# Altium PCB Filtro Final.PcbDoc
Units mm, origin at the board's own origin, x right, y up, seen from the top; angles counter-clockwise.
Board outline 100 x 100.08 mm, 2 copper layers (Top Layer, Bottom Layer); 81 components, 46 nets, 396 pads, 62 vias.
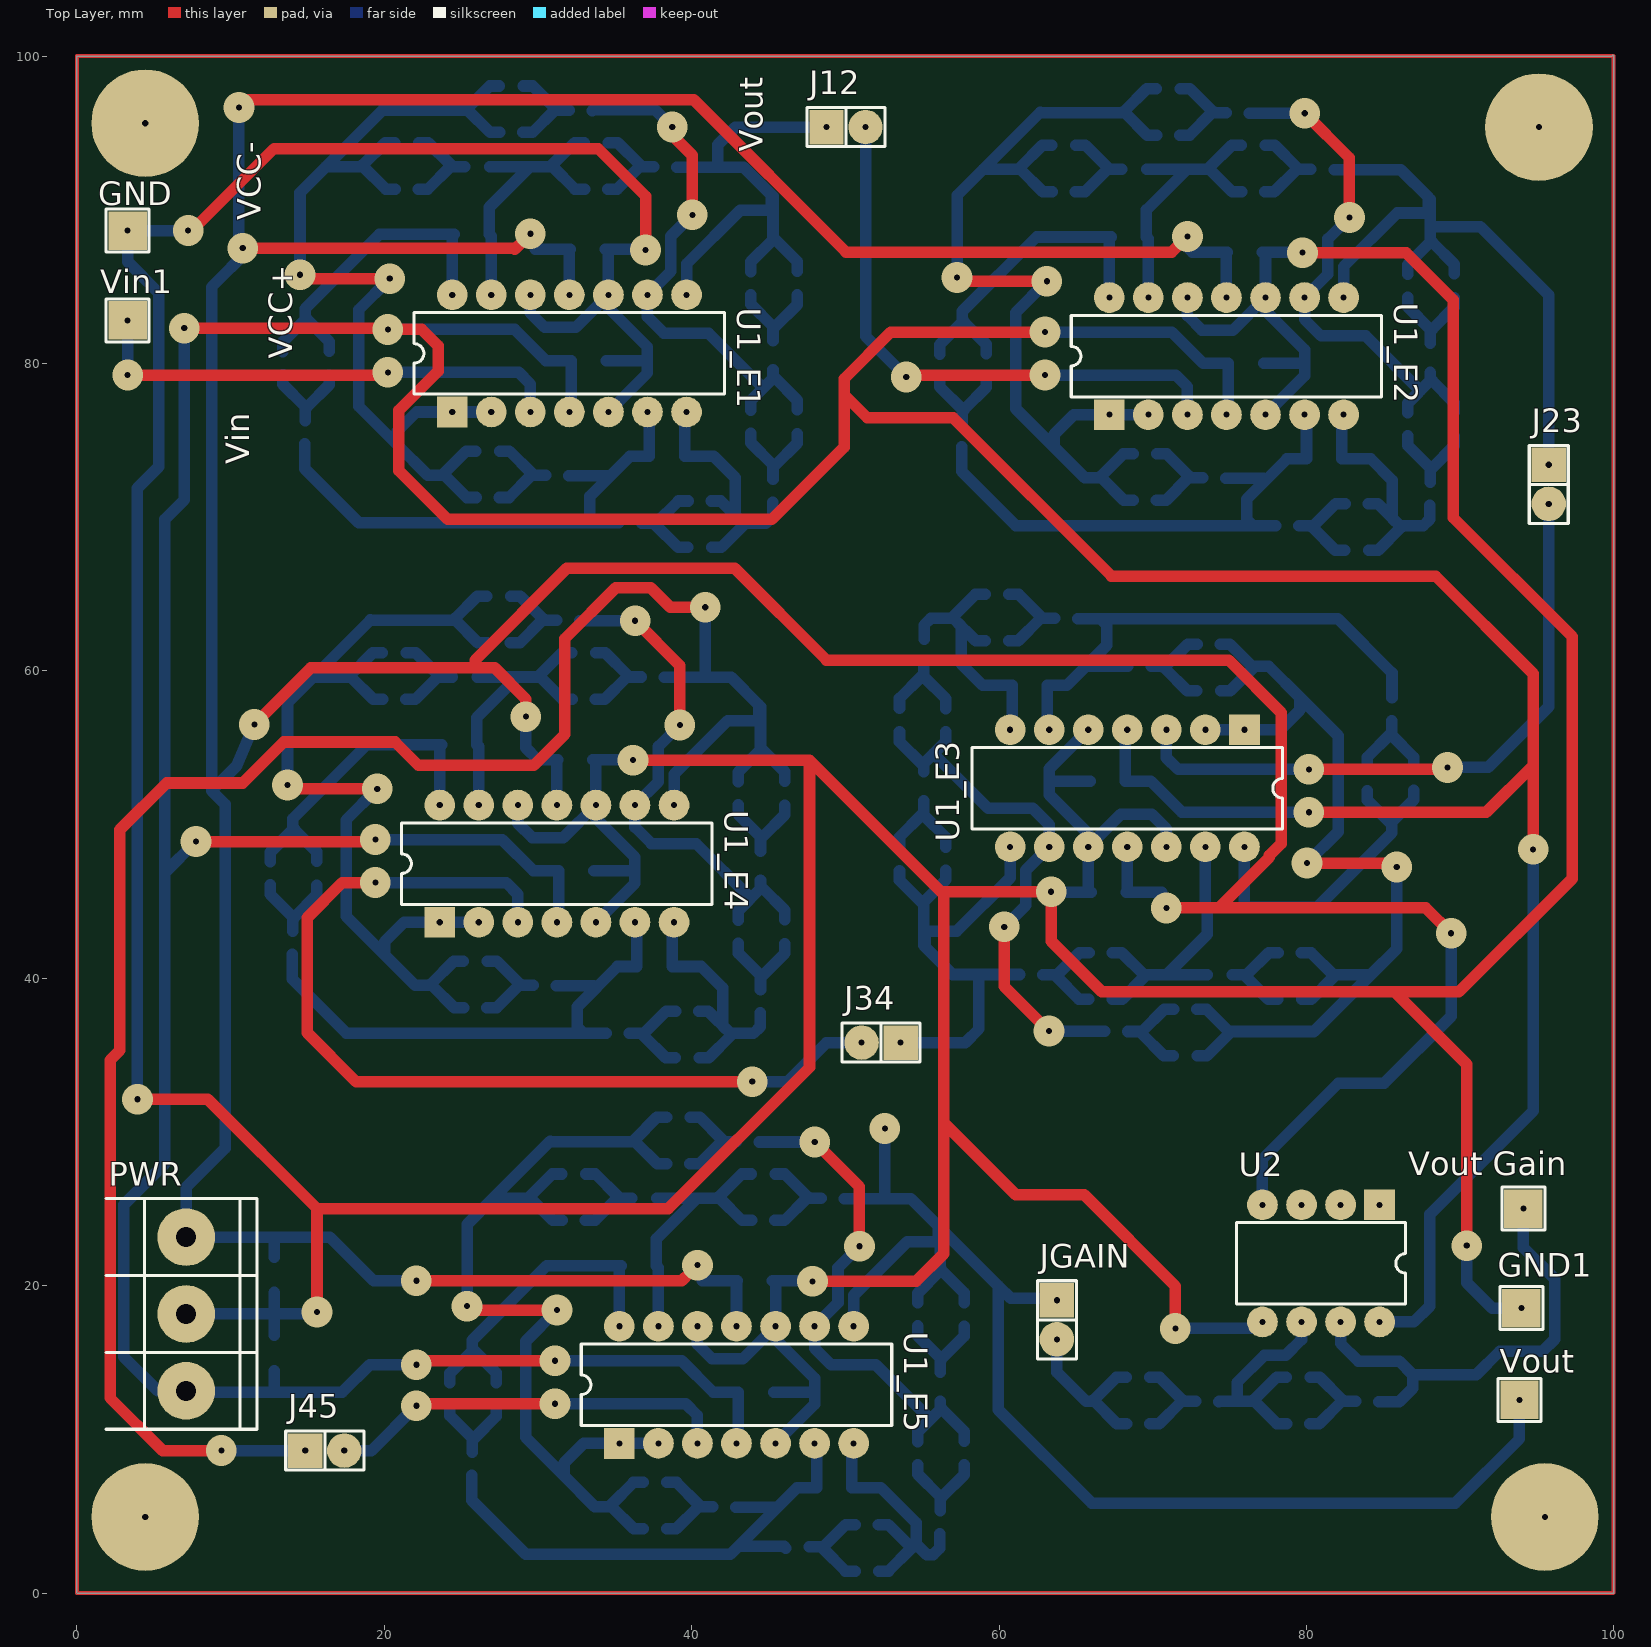
[diagram p0: Top Layer view]
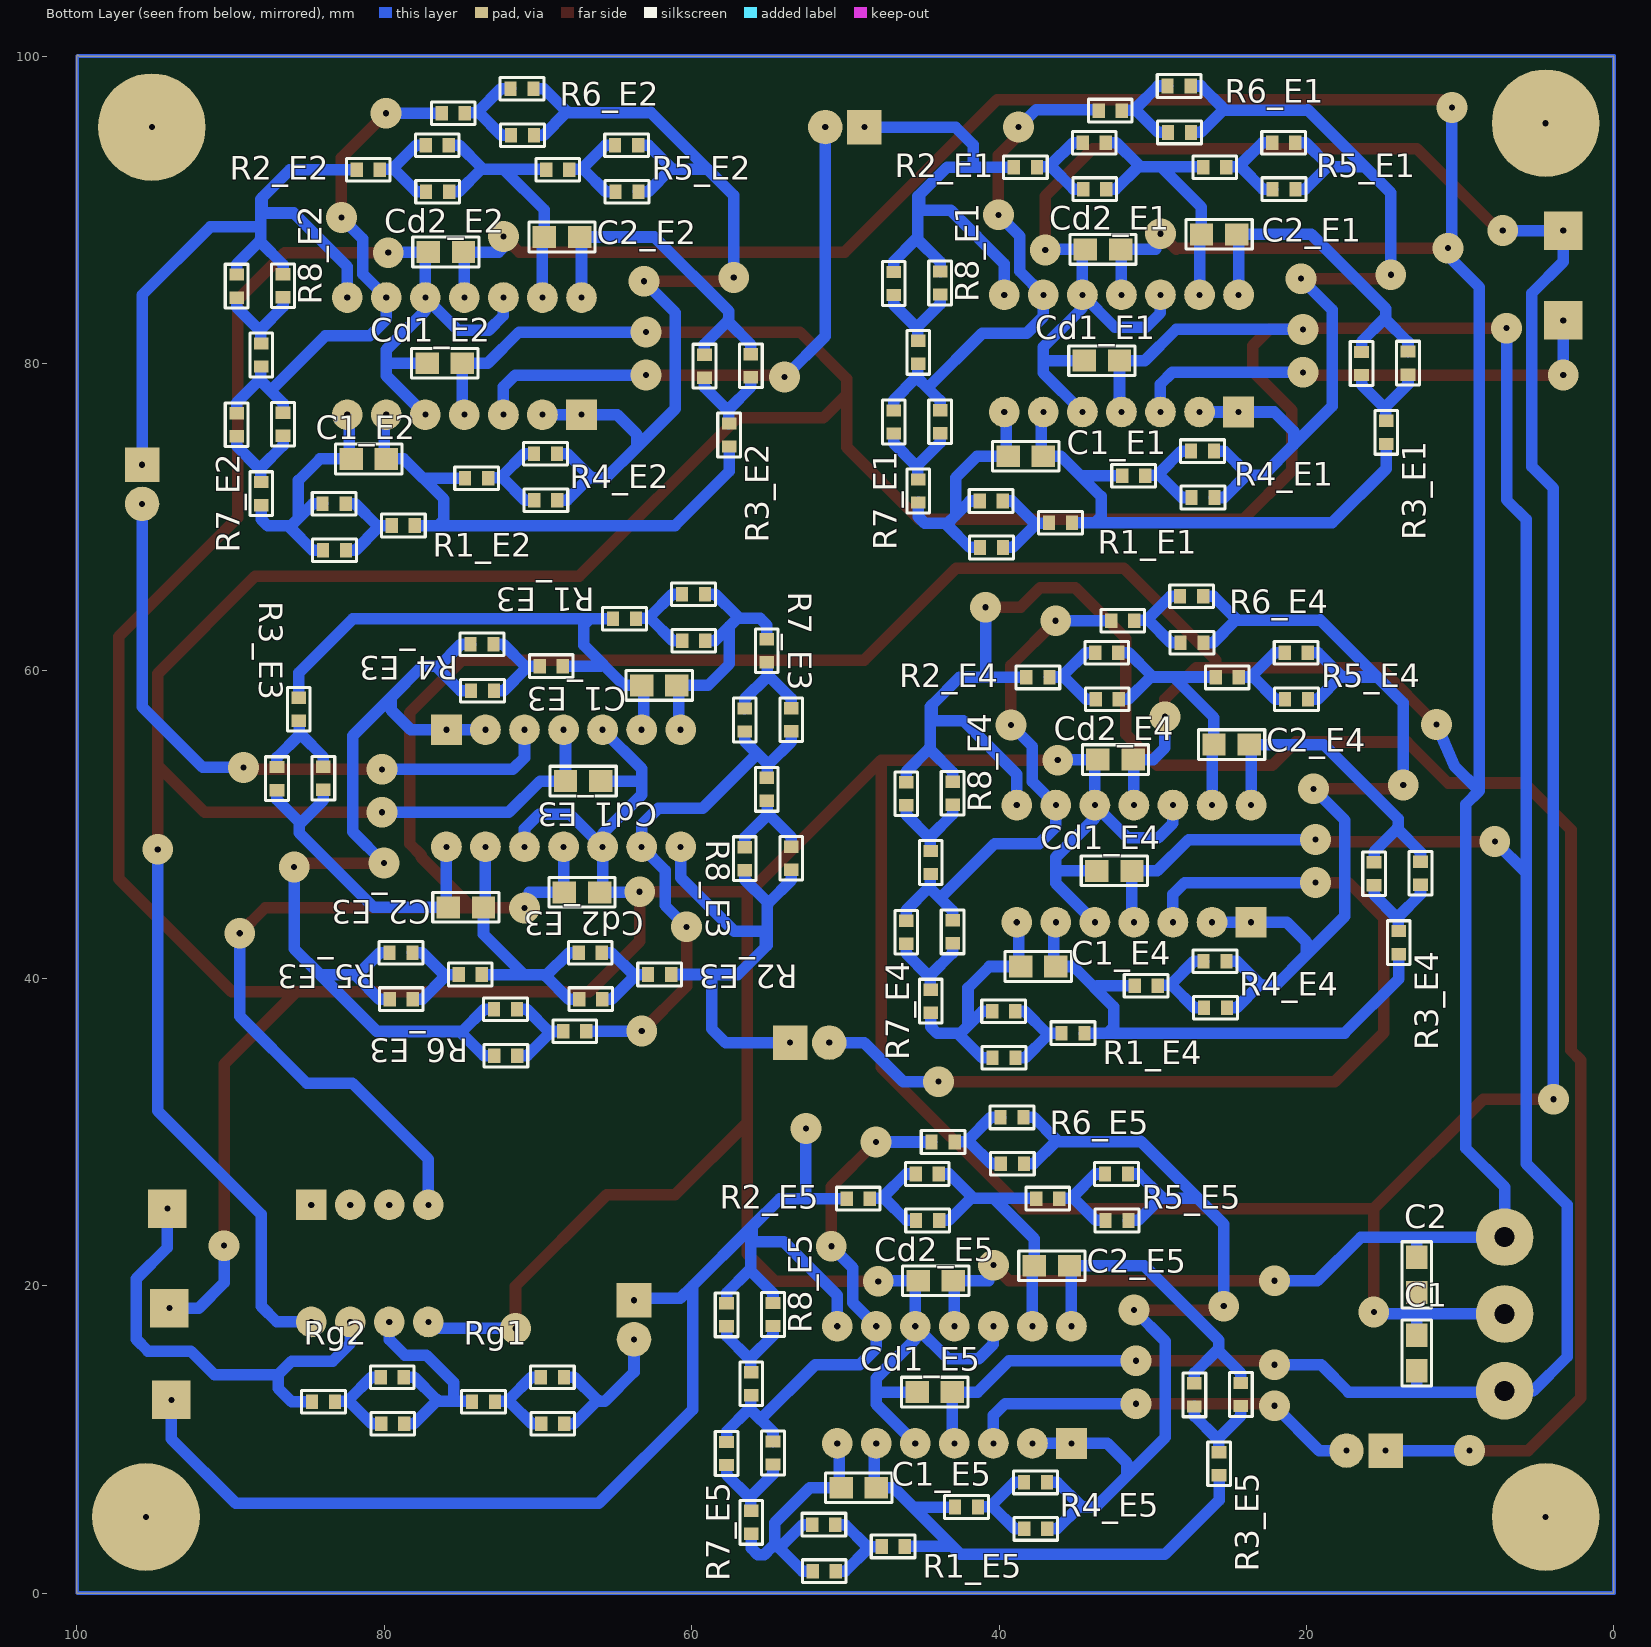
[diagram p1: Bottom Layer view, seen from below]

## Layer stack, top to bottom
Top Solder: solder mask 0.0102, Solder Resist, Dk 3.5
Top Layer: signal copper 0.0356
Dielectric 1: dielectric 0.32, FR-4, Dk 4.8
Bottom Layer: signal copper 0.0356
Bottom Solder: solder mask 0.0102, Solder Resist, Dk 3.5

## Board outline
0,0 100,0 100,100.025 99.949,100.076 99.873,100 0,100 0,0

## Design rules (kind name [scope] priority, off if disabled: settings)
Clearance [All] p1: gap=0.254
PolygonConnect [All] p1: connectstyle=Relief reliefconductorwidth=0.254 reliefentries=4 polygonreliefangle="90 Angle" airgapwidth=0.254
RoomDefinition U_Gain [InComponentClass('U_Gain')] p1: confinementstyle=ConfineIn formatcopy=TRUE lockcomponents=FALSE outline 88.817,27.419 65.068,27.419 65.068,9.131 88.817,9.131
RoomDefinition E5 [InComponentClass('E5')] p2: confinementstyle=ConfineIn formatcopy=TRUE lockcomponents=FALSE outline 20.32,32.131 20.32,-0.127 59.055,-0.127 59.055,32.131
RoomDefinition E4 [InComponentClass('E4')] p3: confinementstyle=ConfineIn formatcopy=TRUE lockcomponents=FALSE outline 8.636,66.04 8.636,33.782 47.371,33.782 47.371,66.04
RoomDefinition E3 [InComponentClass('E3')] p4: confinementstyle=ConfineIn formatcopy=TRUE lockcomponents=FALSE outline 90.932,33.782 90.932,66.04 52.197,66.04 52.197,33.782
RoomDefinition E2 [InComponentClass('E2')] p5: confinementstyle=ConfineIn formatcopy=TRUE lockcomponents=FALSE outline 52.197,99.187 52.197,66.929 90.932,66.929 90.932,99.187
RoomDefinition E1 [InComponentClass('E1')] p6: confinementstyle=ConfineIn formatcopy=TRUE lockcomponents=FALSE outline 9.449,99.233 9.449,66.975 48.184,66.975 48.184,99.233
RoutingVias [All] p1: holewidth=0.4 width=2 viastyle="Through Hole" minholewidth=0.4 minwidth=2 maxholewidth=0.4 maxwidth=2
SolderMaskExpansion [All] p1: expansion=0.102
UnpouredPolygon [All] p1: allowunpoured=FALSE
Width [All] p1: maxlimit=0.75 minlimit=0.75 preferedwidth=0.75
29 further rules are at their usual default settings.

## Classes and differential pairs
component class E1: C1_E1 C2_E1 Cd1_E1 Cd2_E1 R1_E1 R2_E1 R3_E1 R4_E1 R5_E1 R6_E1 R7_E1 R8_E1 U1_E1
component class E2: C1_E2 C2_E2 Cd1_E2 Cd2_E2 R1_E2 R2_E2 R3_E2 R4_E2 R5_E2 R6_E2 R7_E2 R8_E2 U1_E2
component class E3: C1_E3 C2_E3 Cd1_E3 Cd2_E3 R1_E3 R2_E3 R3_E3 R4_E3 R5_E3 R6_E3 R7_E3 R8_E3 U1_E3
component class E4: C1_E4 C2_E4 Cd1_E4 Cd2_E4 R1_E4 R2_E4 R3_E4 R4_E4 R5_E4 R6_E4 R7_E4 R8_E4 U1_E4
component class E5: C1_E5 C2_E5 Cd1_E5 Cd2_E5 R1_E5 R2_E5 R3_E5 R4_E5 R5_E5 R6_E5 R7_E5 R8_E5 U1_E5
component class "Esquemático entero": C1 C2 GND GND1 J12 J23 J34 J45 JGAIN PWR Vin1 Vout "Vout Gain"
component class U_Gain: Rg1 Rg2 U2
channel class FlescherTow: E1 E2 E3 E4 E5

## Components (designator, comment, footprint, x,y, rotation, side; value= is the part's Value field where it differs from the comment)
C1 "4,7uF" 0805 12.827,15.621 r90 bottom
C1_E1 "CAP" 0805 38.265,73.96 r0 bottom (schematic designator C1)
C1_E2 "CAP" 0805 81.013,73.787 r0 bottom (schematic designator C1)
C1_E3 "CAP" 0805 62.116,59.055 r180 bottom (schematic designator C1)
C1_E4 "CAP" 0805 37.452,40.767 r0 bottom (schematic designator C1)
C1_E5 "CAP" 0805 49.136,6.858 r0 bottom (schematic designator C1)
C2 "4,7uF" 0805 12.827,20.701 r90 bottom
C2_E1 "CAP" 0805 25.692,88.399 r180 bottom (schematic designator C2)
C2_E2 "CAP" 0805 68.44,88.227 r180 bottom (schematic designator C2)
C2_E3 "CAP" 0805 74.689,44.615 r0 bottom (schematic designator C2)
C2_E4 "CAP" 0805 24.879,55.207 r180 bottom (schematic designator C2)
C2_E5 "CAP" 0805 36.563,21.298 r180 bottom (schematic designator C2)
Cd1_E1 "100n" 0805 33.312,80.183 r0 bottom (schematic designator Cd1)
Cd1_E2 "100n" 0805 76.06,80.01 r0 bottom (schematic designator Cd1)
Cd1_E3 "100n" 0805 67.069,52.832 r180 bottom (schematic designator Cd1)
Cd1_E4 "100n" 0805 32.499,46.99 r0 bottom (schematic designator Cd1)
Cd1_E5 "100n" 0805 44.183,13.081 r0 bottom (schematic designator Cd1)
Cd2_E1 "100n" 0805 33.243,87.422 r0 bottom (schematic designator Cd2)
Cd2_E2 "100n" 0805 75.991,87.249 r0 bottom (schematic designator Cd2)
Cd2_E3 "100n" 0805 67.138,45.593 r180 bottom (schematic designator Cd2)
Cd2_E4 "100n" 0805 32.43,54.229 r0 bottom (schematic designator Cd2)
Cd2_E5 "100n" 0805 44.114,20.32 r0 bottom (schematic designator Cd2)
GND "TP" TPTH 3.302,88.646 r0 top
GND1 "TP" TPTH 93.98,18.542 r90 top
J12 "Connect" JUMPER2#1 50.038,95.377 r0 top
J23 "Connect" JUMPER2#1 95.758,72.136 r270 top
J34 "Connect" JUMPER2#1 52.324,35.814 r180 top
J45 "Connect" JUMPER2#1 16.129,9.271 r0 top
JGAIN "JUMPER" JUMPER2#2 63.754,17.78 r270 top
PWR "" BORNERA3 7.112,18.161 r180 top
R1_E1 "" PCBComponent_1#1 44.361,68.499 r180 bottom (schematic designator R1)
R1_E2 "" PCBComponent_1#2 87.109,68.326 r180 bottom (schematic designator R1)
R1_E3 "" PCBComponent_1#2 56.02,64.516 r0 bottom (schematic designator R1)
R1_E4 "" PCBComponent_1#2 43.548,35.306 r180 bottom (schematic designator R1)
R1_E5 "" PCBComponent_1#2 55.245,1.905 r180 bottom (schematic designator R1)
R2_E1 "" PCBComponent_1#2 29.941,93.899 r0 bottom (schematic designator R2)
R2_E2 "" PCBComponent_1#2 72.689,93.726 r0 bottom (schematic designator R2)
R2_E3 "" PCBComponent_1#2 70.44,39.116 r180 bottom (schematic designator R2)
R2_E4 "" PCBComponent_1#2 29.128,60.706 r0 bottom (schematic designator R2)
R2_E5 "" PCBComponent_1#2 40.812,26.797 r0 bottom (schematic designator R2)
R3_E1 "" PCBComponent_1#2 15.951,83.866 r270 bottom (schematic designator R3)
R3_E2 "" PCBComponent_1#2 58.699,83.693 r270 bottom (schematic designator R3)
R3_E3 "" PCBComponent_1#2 84.43,49.149 r90 bottom (schematic designator R3)
R3_E4 "" PCBComponent_1#2 15.138,50.673 r270 bottom (schematic designator R3)
R3_E5 "" PCBComponent_1#2 26.822,16.764 r270 bottom (schematic designator R3)
R4_E1 "" PCBComponent_1#2 22.898,73.833 r0 bottom (schematic designator R4)
R4_E2 "" PCBComponent_1#2 65.646,73.66 r0 bottom (schematic designator R4)
R4_E3 "" PCBComponent_1#2 77.483,59.182 r180 bottom (schematic designator R4)
R4_E4 "" PCBComponent_1#2 22.085,40.64 r0 bottom (schematic designator R4)
R4_E5 "" PCBComponent_1#2 33.769,6.731 r0 bottom (schematic designator R4)
R5_E1 "" PCBComponent_1#3 17.622,93.899 r0 bottom (schematic designator R5)
R5_E2 "" PCBComponent_1#2 60.37,93.726 r0 bottom (schematic designator R5)
R5_E3 "" PCBComponent_1#2 82.759,39.116 r180 bottom (schematic designator R5)
R5_E4 "" PCBComponent_1#2 16.809,60.706 r0 bottom (schematic designator R5)
R5_E5 "" PCBComponent_1#2 28.493,26.797 r0 bottom (schematic designator R5)
R6_E1 "" PCBComponent_1#2 24.422,97.582 r0 bottom (schematic designator R6)
R6_E2 "" PCBComponent_1#2 67.17,97.409 r0 bottom (schematic designator R6)
R6_E3 "" PCBComponent_1#2 75.959,35.433 r180 bottom (schematic designator R6)
R6_E4 "" PCBComponent_1#2 23.609,64.389 r0 bottom (schematic designator R6)
R6_E5 "" PCBComponent_1#2 35.293,30.48 r0 bottom (schematic designator R6)
R7_E1 "" PCBComponent_1#1 46.393,80.056 r270 bottom (schematic designator R7)
R7_E2 "" PCBComponent_1#2 89.141,79.883 r270 bottom (schematic designator R7)
R7_E3 "" PCBComponent_1#2 53.988,52.959 r90 bottom (schematic designator R7)
R7_E4 "" PCBComponent_1#2 45.58,46.863 r270 bottom (schematic designator R7)
R7_E5 "" PCBComponent_1#2 57.264,12.954 r270 bottom (schematic designator R7)
R8_E1 "" PCBComponent_1#2 46.393,89.073 r270 bottom (schematic designator R8)
R8_E2 "" PCBComponent_1#2 89.141,88.9 r270 bottom (schematic designator R8)
R8_E3 "" PCBComponent_1#2 53.988,43.942 r90 bottom (schematic designator R8)
R8_E4 "" PCBComponent_1#2 45.58,55.88 r270 bottom (schematic designator R8)
R8_E5 "" PCBComponent_1#2 57.264,21.971 r270 bottom (schematic designator R8)
Rg1 "" PCBComponent_1#2 65.195,13.576 r0 bottom
Rg2 "" PCBComponent_1#2 75.609,13.576 r0 bottom
U1_E1 "TL074" J014 32.042,80.652 r0 top (schematic designator U1)
U1_E2 "TL074" J014 74.79,80.48 r0 top (schematic designator U1)
U1_E3 "TL074" J014 68.339,52.362 r180 top (schematic designator U1)
U1_E4 "TL074" J014 31.229,47.46 r0 top (schematic designator U1)
U1_E5 "TL074" J014 42.913,13.551 r0 top (schematic designator U1)
U2 "TL082" DIP8 80.943,21.45 r180 top
Vin1 "TP" TPTH 3.302,82.804 r0 top
Vout "TP" TPTH 93.853,12.573 r90 top
"Vout Gain" "TP" TPTH 94.107,25.019 r90 top

## Footprints (in the part's own frame and the unit in brackets; to place one, negate y for a bottom-side part, rotate by r counter-clockwise, add the part's x,y. Pads: shape width x height; smd on the part's side, far side on the other; paste and mask are expansions set on the pad)
0805 [mil] "Pasivo 0805"
  rect 60x56 smd: 1(-45,0) 2(45,0)
  silkscreen extent -85,-38 85,38, body extent -39,-25 39,25, height 15
BORNERA3 [mm] "Bornera con Tornillos 5mm separación"
  round 3.75 hole 1.3: 1(0,5) 2(0,0) 3(0,-5)
  silkscreen extent -4.6,-7.5 5.2,7.5, body extent -3.76,-7.39 3.94,8.11, height 10.05
DIP8 [mm] "DIP; 8 Leads; Row Spacing 7.62 mm; Pitch 2.54 mm"
  rect 2x2 hole 0.4: 1(-3.81,-3.81)
  round 2 hole 0.4: 2(-1.27,-3.81) 3(1.27,-3.81) 4(3.81,-3.81) 5(3.81,3.81) 6(1.27,3.81) 7(-1.27,3.81) 8(-3.81,3.81)
  silkscreen extent -5.5,-2.65 5.5,2.65
J014 [mm] "DIP; 14 Leads; Row Spacing 7.62 mm; Pitch 2.54 mm"
  rect 2x2 hole 0.4: 1(-7.62,-3.81)
  round 2 hole 0.4: 2(-5.08,-3.81) 3(-2.54,-3.81) 4(0,-3.81) 5(2.54,-3.81) 6(5.08,-3.81) 7(7.62,-3.81) 8(7.62,3.81) 9(5.08,3.81) 10(2.54,3.81) 11(0,3.81) 12(-2.54,3.81) 13(-5.08,3.81) 14(-7.62,3.81)
  silkscreen extent -10.1,-2.65 10.1,2.65
JUMPER2#1 [mm]
  rect 2.24x2.24 hole 0.4: 1(-1.27,0)
  round 2.24 hole 0.4: 2(1.27,0)
  silkscreen extent -2.54,-1.27 2.54,1.27, body extent -2.46,-1.27 2.54,1.27, height 9.5
JUMPER2#2 [mm]
  rect 2.25x2.25 hole 0.4: 1(-1.27,0)
  round 2.25 hole 0.4: 2(1.27,0)
  silkscreen extent -2.54,-1.27 2.54,1.27, body extent -2.46,-1.27 2.54,1.27, height 9.5
PCBComponent_1#1 [mm]
  rect 0.8x0.95 smd: 1(3.092,2.553) 1(3.118,-0.47) 2(9.1,1.13) ""(4.592,2.553) ""(4.618,-0.47) ""(7.6,1.13)
  Top Layer lines w0.75: 7.6,1.105 6.667,1.105 5.22,2.553 4.592,2.553 ; 6.693,0.978 5.245,-0.47 4.618,-0.47 ; 3.092,2.553 2.465,2.553 1.524,1.612 1.017,1.105 0.471,1.105 ; 3.067,-0.47 2.439,-0.47 0.991,0.978
  silkscreen extent 2.42,-1.21 9.77,3.29, body extent 3.04,-0.88 9.15,2.95, height 0.44
PCBComponent_1#2 [mm]
  rect 0.8x0.95 smd: 1(3.092,2.553) 1(3.118,-0.47) 2(9.1,1.13) ""(4.592,2.553) ""(4.618,-0.47) ""(7.6,1.13)
  Top Layer lines w0.75: 7.6,1.105 6.667,1.105 5.22,2.553 4.592,2.553 ; 6.693,0.978 5.245,-0.47 4.618,-0.47 ; 3.092,2.553 2.465,2.553 1.017,1.105 0.471,1.105 ; 3.067,-0.47 2.439,-0.47 0.991,0.978
  silkscreen extent 2.42,-1.21 9.77,3.29, body extent 3.04,-0.88 9.15,2.95, height 0.44
PCBComponent_1#3 [mm]
  rect 0.8x0.95 smd: 1(3.092,2.553) 1(3.118,-0.47) 2(9.1,1.13) ""(4.592,2.553) ""(4.618,-0.47) ""(7.6,1.13)
  Top Layer lines w0.75: 0.471,1.105 0.539,1.105 0.666,1.105 1.017,1.105 2.465,2.553 3.092,2.553 ; 0.991,0.978 1.017,0.953 2.439,-0.47 3.067,-0.47 ; 4.592,2.553 5.22,2.553 6.668,1.105 7.6,1.105 ; 4.618,-0.47 5.245,-0.47 6.693,0.978
  silkscreen extent 2.42,-1.21 9.77,3.29, body extent 3.04,-0.88 9.15,2.95, height 0.44
TPTH [mm]
  rect 2.5x2.5 hole 0.4: 1(0,0)
  silkscreen extent -1.4,-1.4 1.4,1.4, body extent -1.27,-1.27 1.27,1.27, height 6.04

## Part data
C1 C2 Cd1_E1 Cd1_E2 Cd1_E3 Cd1_E4 Cd1_E5 Cd2_E1 Cd2_E2 Cd2_E3 Cd2_E4 Cd2_E5: library part CAP
J12 J23 J34 J45: library part JUMPER
PWR: library part "BORNERA 3"
R1_E1 R1_E2 R1_E3 R1_E4 R1_E5 R2_E1 R2_E2 R2_E3 R2_E4 R2_E5 R3_E1 R3_E2 R3_E3 R3_E4 R3_E5 R4_E1 R4_E2 R4_E3 R4_E4 R4_E5 R5_E1 R5_E2 R5_E3 R5_E4 R5_E5 R6_E1 R6_E2 R6_E3 R6_E4 R6_E5 R7_E1 R7_E2 R7_E3 R7_E4 R7_E5 R8_E1 R8_E2 R8_E3 R8_E4 R8_E5 Rg1 Rg2: library part SPres
U1_E1 U1_E2 U1_E3 U1_E4 U1_E5: library part TL074J, "Low-Noise JFET-Input Operational Amplifier"
U2: library part TL082AMN, "General-Purpose J-FET Dual Operational Amplifier"

## Free pads (board coordinates)
  round 7 hole 0.4: 0(4.445,4.953) 0(4.445,95.631) 0(95.123,95.377) 0(95.504,4.953)

## Via types
v1: diameter 2, hole 0.4, Top Layer to Bottom Layer, 62 vias

## Nets (pads, with @x,y where several pads share a name; then routed paths per layer and width w, separated by ;. In a path a pad name is that pad's centre, name@x,y a point inside that pad or via, vN(x,y) a via of type N, cw(c..) or ccw(c..) an arc to the next point about the centre after c; other vN are vias at no path point)
+15: C1.1 Cd1_E1.1 Cd1_E2.1 Cd1_E3.1 Cd1_E4.1 Cd1_E5.1 PWR.1 U1_E1.4 U1_E2.4 U1_E3.4 U1_E4.4 U1_E5.4 U2.8 | length 387.8
  Top Layer w0.75: v1(6.985,82.296) v1@19.805,82.296 ; v1(7.747,48.895) 19.291,48.895 v1(19.418,49.022) ; v1(20.231,82.215) 22.433,82.215 23.495,81.153 23.495,79.502 20.955,76.962 20.955,73.025 24.13,69.85 45.212,69.85 49.911,74.549 49.911,77.978 ; v1(22.085,14.859) 22.339,15.113 v1(31.102,15.113) ; v1(62.979,82.042) 52.959,82.042 49.911,78.994 49.911,77.978 ; v1(80.15,50.8) 91.694,50.8 94.742,53.848 ; v1(94.742,48.387) 94.742,53.848 ; 49.911,77.978 51.435,76.454 57.023,76.454 67.31,66.167 88.392,66.167 94.742,59.817 94.742,53.848
  Bottom Layer w0.75: v1(6.985,82.296) 6.985,71.12 5.715,69.85 5.715,46.863 ; PWR.1@7.112,13.081 12.954,13.081 ; PWR.1 5.254,13.161 3.048,15.367 3.048,25.273 5.715,27.94 5.715,46.863 ; v1(7.747,48.895) 5.715,46.863 ; C1.1 12.827,13.208 12.954,13.081 ; v1(19.418,49.022) 27.673,49.022 29.705,46.99 Cd1_E4.1 31.356,43.777 U1_E4.4 ; v1(20.231,82.215) 28.486,82.215 30.518,80.183 Cd1_E1.1 32.169,76.969 U1_E1.4 ; v1(22.085,14.859) 19.05,14.859 17.272,13.081 12.954,13.081 ; v1(31.102,15.113) 39.357,15.113 41.389,13.081 Cd1_E5.1 43.04,9.868 U1_E5.4 ; v1(62.979,82.042) 71.234,82.042 73.266,80.01 Cd1_E2.1 74.917,76.797 U1_E2.4 ; U1_E3.4 68.212,56.045 Cd1_E3.1 69.863,52.832 71.895,50.8 v1(80.15,50.8) ; U2.8 86.982,17.64 88.011,18.669 88.011,24.638 94.742,31.369 v1(94.742,48.387)
-15: C2.2 Cd2_E1.1 Cd2_E2.1 Cd2_E3.1 Cd2_E4.1 Cd2_E5.1 PWR.3 U1_E1.11 U1_E2.11 U1_E3.11 U1_E4.11 U1_E5.11 U2.4 | length 367.6
  Top Layer w0.75: v1(10.541,96.647) 11.049,97.155 40.132,97.155 50.038,87.249 71.234,87.249 v1@71.771,87.786 ; v1(10.795,87.503) 28.405,87.503 28.486,87.422 v1@29.023,87.958 ; v1(11.544,56.515) 15.227,60.198 25.908,60.198 ; v1(22.085,20.32) 39.357,20.32 v1@39.894,20.857 ; v1(29.21,57.023) 29.21,58.166 27.178,60.198 25.908,60.198 ; v1(70.879,44.577) 74.287,44.577 ; v1(89.408,42.926) 87.757,44.577 74.287,44.577 ; 25.908,60.198 25.908,60.706 31.877,66.675 42.799,66.675 48.768,60.706 74.93,60.706 78.359,57.277 78.359,48.768 77.588,47.997 77.588,47.877 74.287,44.577
  Bottom Layer w0.75: PWR.3 7.112,26.416 9.652,28.956 9.652,51.308 8.763,52.197 ; PWR.3@8.763,23.161 12.827,23.161 ; v1(10.541,96.647) 10.541,88.095 11.214,87.422 8.763,84.97 8.763,52.197 ; v1(11.544,56.515) 10.401,53.835 8.763,52.197 ; C2.2 12.827,23.161 ; v1(22.085,20.32) 19.304,20.32 16.463,23.161 12.827,23.161 ; v1(29.21,57.023) 29.21,54.991 29.972,54.229 Cd2_E4.1@31.229,54.229 ; 29.814,87.422 Cd2_E1.1@32.042,87.422 ; U1_E4.11 Cd2_E4.1@31.229,54.229 ; Cd2_E4.1 Cd2_E4.1@31.229,54.229 ; U1_E1.11 Cd2_E1.1@32.042,87.422 ; Cd2_E1.1 Cd2_E1.1@32.042,87.422 ; 40.685,20.32 Cd2_E5.1@42.913,20.32 ; U1_E5.11 Cd2_E5.1@42.913,20.32 ; Cd2_E5.1 Cd2_E5.1@42.913,20.32 ; Cd2_E3.1 Cd2_E3.1@68.339,45.593 ; U1_E3.11 Cd2_E3.1@68.339,45.593 ; 70.567,45.593 Cd2_E3.1@68.339,45.593 ; v1(72.25,88.265) 72.25,87.56 72.562,87.249 Cd2_E2.1@74.79,87.249 ; U1_E2.11 Cd2_E2.1@74.79,87.249 ; Cd2_E2.1 Cd2_E2.1@74.79,87.249 ; U2.4 77.133,28.238 82.077,33.182 85.055,33.182 89.408,37.535 v1(89.408,42.926)
  other v1: 40.373,21.336 29.502,88.438
GND: C1.2 C2.1 Cd1_E1.2 Cd1_E2.2 Cd1_E3.2 Cd1_E4.2 Cd1_E5.2 Cd2_E1.2 Cd2_E2.2 Cd2_E3.2 Cd2_E4.2 Cd2_E5.2 GND1.1 GND.1 PWR.2 U1_E1.5 U1_E1.10 U1_E1.12 U1_E2.5 U1_E2.10 U1_E2.12 U1_E3.5 U1_E3.10 U1_E3.12 U1_E4.5 U1_E4.10 U1_E4.12 U1_E5.5 U1_E5.10 U1_E5.12 U2.5 | length 525.4
  Top Layer w0.75: v1(3.937,32.131) 8.509,32.131 15.621,25.019 ; v1(7.239,88.646) 7.493,88.646 12.827,93.98 33.909,93.98 36.995,90.894 v1(36.995,87.383) ; v1(15.621,18.288) 15.621,25.019 ; v1(36.182,54.191) 47.663,54.191 ; v1(47.866,20.282) 54.597,20.282 56.388,22.073 56.388,30.607 ; v1(71.464,17.221) 71.464,19.976 65.532,25.908 61.087,25.908 56.388,30.607 ; v1(79.743,87.211) 86.474,87.211 89.535,84.15 89.535,69.977 97.282,62.23 97.282,46.482 89.916,39.116 66.675,39.116 63.386,42.405 v1(63.386,45.631) 56.223,45.631 ; 85.725,39.116 90.424,34.417 v1(90.424,22.606) ; 15.621,25.019 38.481,25.019 47.663,34.201 47.663,54.191 ; 47.663,54.191 56.223,45.631 ; 56.223,45.631 56.388,45.466 56.388,30.607
  Bottom Layer w0.75: v1(3.937,32.131) 3.937,71.882 5.334,73.279 5.334,84.582 3.302,86.614 GND.1 v1(7.239,88.646) ; PWR.2 12.827,18.161 ; C1.2 12.827,18.161 ; C2.1 12.827,18.161 ; v1(15.621,18.288) 15.494,18.161 12.827,18.161 ; U1_E4.12 28.689,50.095 29.636,49.149 31.648,49.149 U1_E4.10 ; U1_E1.12 29.502,83.288 30.449,82.342 32.461,82.342 U1_E1.10 ; Cd2_E4.2 Cd2_E4.2@33.769,54.229 ; Cd1_E4.2 36.309,46.99 ; U1_E4.5 36.309,46.19 36.309,46.99 ; Cd2_E1.2 Cd2_E1.2@34.582,87.422 ; Cd1_E1.2 37.122,80.183 ; U1_E1.5 37.122,79.382 37.122,80.183 ; v1(36.182,54.191) 36.22,54.229 Cd2_E4.2@33.769,54.229 ; v1(36.995,87.383) 37.033,87.422 Cd2_E1.2@34.582,87.422 ; U1_E5.12 40.373,16.186 41.32,15.24 43.332,15.24 U1_E5.10 ; Cd2_E5.2 Cd2_E5.2@45.453,20.32 ; Cd1_E5.2 47.993,13.081 ; U1_E5.5 47.993,12.281 47.993,13.081 ; v1(47.866,20.282) 47.904,20.32 Cd2_E5.2@45.453,20.32 ; v1(63.386,45.631) 63.348,45.593 Cd2_E3.2@65.799,45.593 ; U1_E3.5 63.259,53.632 63.259,52.832 ; Cd1_E3.2 63.259,52.832 ; Cd2_E3.2 Cd2_E3.2@65.799,45.593 ; U1_E3.12 70.879,49.727 69.932,50.673 67.92,50.673 U1_E3.10 ; v1(71.464,17.221) 76.714,17.221 U2.5 ; U1_E2.12 72.25,83.115 73.197,82.169 75.209,82.169 U1_E2.10 ; Cd2_E2.2 Cd2_E2.2@77.33,87.249 ; Cd1_E2.2 79.87,80.01 ; U1_E2.5 79.87,79.21 79.87,80.01 ; v1(79.743,87.211) 79.781,87.249 Cd2_E2.2@77.33,87.249 ; v1(90.424,22.606) 90.424,20.193 92.075,18.542 GND1.1 ; U1_E4.10 Cd2_E4.2@33.769,54.229 ; U1_E4.10 33.769,50.419 36.309,47.879 36.309,46.99 ; U1_E1.10 34.582,83.612 37.122,81.072 37.122,80.183 ; U1_E1.10 Cd2_E1.2@34.582,87.422 ; U1_E5.10 Cd2_E5.2@45.453,20.32 ; U1_E5.10 45.453,16.51 47.993,13.97 47.993,13.081 ; 63.259,52.832 63.259,51.943 65.799,49.403 U1_E3.10 ; Cd2_E3.2@65.799,45.593 U1_E3.10 ; U1_E2.10 Cd2_E2.2@77.33,87.249 ; U1_E2.10 77.33,83.439 79.87,80.899 79.87,80.01
NetC1_E1_1: C1_E1.1 R1_E1.2 R3_E1.2 R4_E1.2 U1_E1.6 | length 35.7
  Bottom Layer w0.75: R3_E1.2 14.821,73.147 18.339,69.629 33.763,69.629 ; R4_E1.2 34.442,72.702 34.519,72.626 ; R1_E1.2 33.763,69.629 ; U1_E1.6@37.249,76.715 37.249,73.96 35.979,73.96 33.37,71.35 33.37,70.023 33.763,69.629
NetC1_E1_2: C1_E1.2 R1_E1.1 R7_E1.2 U1_E1.7 | length 12.8
  Bottom Layer w0.75: U1_E1.7@39.535,76.715 39.535,73.96 41.44,73.96 42.837,72.563 42.837,70.111 43.344,69.603 44.831,69.603 45.263,70.035 R7_E1.2
NetC1_E2_1: C1_E2.1 R1_E2.2 R3_E2.2 R4_E2.2 U1_E2.6 | length 35.7
  Bottom Layer w0.75: R3_E2.2 57.569,72.974 61.087,69.456 76.511,69.456 ; R4_E2.2 77.191,72.53 77.267,72.453 ; R1_E2.2 76.511,69.456 ; U1_E2.6@79.997,76.543 79.997,73.787 78.727,73.787 76.118,71.177 76.118,69.85 76.511,69.456
NetC1_E2_2: C1_E2.2 R1_E2.1 R7_E2.2 U1_E2.7 | length 12.8
  Bottom Layer w0.75: U1_E2.7@82.283,76.543 82.283,73.787 84.188,73.787 85.585,72.39 85.585,69.938 86.093,69.431 87.579,69.431 88.011,69.863 R7_E2.2
NetC1_E3_1: C1_E3.1 R1_E3.2 R3_E3.2 R4_E3.2 U1_E3.6 | length 35.7
  Bottom Layer w0.75: U1_E3.6@63.132,56.299 63.132,59.055 64.402,59.055 67.011,61.665 67.011,62.992 66.618,63.386 ; R1_E3.2 66.618,63.386 ; 65.862,60.389 65.938,60.312 R4_E3.2 ; R3_E3.2 85.56,59.868 82.042,63.386 66.618,63.386
NetC1_E3_2: C1_E3.2 R1_E3.1 R7_E3.2 U1_E3.7 | length 12.8
  Bottom Layer w0.75: R7_E3.2 55.118,62.979 55.55,63.411 57.036,63.411 57.544,62.904 57.544,60.452 58.941,59.055 60.846,59.055 U1_E3.7@60.846,56.299
NetC1_E4_1: C1_E4.1 R1_E4.2 R3_E4.2 R4_E4.2 U1_E4.6 | length 35.7
  Bottom Layer w0.75: R3_E4.2 14.008,39.954 17.526,36.436 32.95,36.436 ; R4_E4.2 33.63,39.51 33.706,39.433 ; R1_E4.2 32.95,36.436 ; U1_E4.6@36.436,43.523 36.436,40.767 35.166,40.767 32.557,38.157 32.557,36.83 32.95,36.436
NetC1_E4_2: C1_E4.2 R1_E4.1 R7_E4.2 U1_E4.7 | length 12.8
  Bottom Layer w0.75: U1_E4.7@38.722,43.523 38.722,40.767 40.627,40.767 42.024,39.37 42.024,36.918 42.532,36.411 44.018,36.411 44.45,36.843 R7_E4.2
NetC1_E5_1: C1_E5.1 R1_E5.2 R3_E5.2 R4_E5.2 U1_E5.6 | length 35.7
  Bottom Layer w0.75: R3_E5.2 25.692,6.045 29.21,2.527 42.52,2.527 46.85,6.858 48.12,6.858 U1_E5.6@48.12,9.614 ; R4_E5.2 45.314,5.601 45.39,5.524 ; 43.066,3.048 46.005,3.048 R1_E5.2@46.132,2.921
NetC1_E5_2: C1_E5.2 R1_E5.1 R7_E5.2 U1_E5.7 | length 12.2
  Bottom Layer w0.75: U1_E5.7@50.406,9.614 50.406,6.858 52.311,6.858 54.597,4.572 54.597,3.187 54.774,3.01 55.282,2.502 55.702,2.502 56.134,2.934 R7_E5.2
NetC2_E1_1: C2_E1.1 R2_E1.1 R5_E1.2 U1_E1.13 | length 12.9
  Bottom Layer w0.75: C2_E1.1 26.835,90.158 29.471,92.794 ; R5_E1.2@26.855,92.794 29.471,92.794 ; U1_E1.13 C2_E1.1@26.962,88.272 ; 30.411,92.794 29.471,92.794
NetC2_E1_2: C2_E1.2 R3_E1.1 U1_E1.14 | length 15.9
  Bottom Layer w0.75: 14.846,83.395 14.846,83.561 19.685,88.399 C2_E1.2 24.422,88.272 U1_E1.14
NetC2_E2_1: C2_E2.1 R2_E2.1 R5_E2.2 U1_E2.13 | length 12.9
  Bottom Layer w0.75: C2_E2.1 69.583,89.986 72.219,92.621 ; R5_E2.2@69.603,92.621 72.219,92.621 ; U1_E2.13 C2_E2.1@69.71,88.1 ; 73.159,92.621 72.219,92.621
NetC2_E2_2: C2_E2.2 R3_E2.1 U1_E2.14 | length 15.9
  Bottom Layer w0.75: 57.594,83.222 57.594,83.388 62.433,88.227 C2_E2.2 67.17,88.1 U1_E2.14
NetC2_E3_1: C2_E3.1 R2_E3.1 R5_E3.2 U1_E3.13 | length 12.9
  Bottom Layer w0.75: 69.97,40.221 70.91,40.221 ; C2_E3.1@73.419,44.742 U1_E3.13 ; R5_E3.2@73.526,40.221 70.91,40.221 ; C2_E3.1 73.546,42.856 70.91,40.221
NetC2_E3_2: C2_E3.2 R3_E3.1 U1_E3.14 | length 15.9
  Bottom Layer w0.75: U1_E3.14 75.959,44.742 C2_E3.2 80.696,44.615 85.534,49.454 85.534,49.62
NetC2_E4_1: C2_E4.1 R2_E4.1 R5_E4.2 U1_E4.13 | length 12.9
  Bottom Layer w0.75: C2_E4.1 26.022,56.966 28.658,59.601 ; R5_E4.2@26.042,59.601 28.658,59.601 ; U1_E4.13 C2_E4.1@26.149,55.08 ; 29.598,59.601 28.658,59.601
NetC2_E4_2: C2_E4.2 R3_E4.1 U1_E4.14 | length 15.9
  Bottom Layer w0.75: 14.034,50.202 14.034,50.368 18.872,55.207 C2_E4.2 23.609,55.08 U1_E4.14
NetC2_E5_1: C2_E5.1 R2_E5.1 R5_E5.2 U1_E5.13 | length 12.9
  Bottom Layer w0.75: C2_E5.1 37.706,23.057 40.342,25.692 ; R5_E5.2@37.726,25.692 40.342,25.692 ; U1_E5.13 C2_E5.1@37.833,21.171 ; 41.282,25.692 40.342,25.692
NetC2_E5_2: C2_E5.2 R3_E5.1 U1_E5.14 | length 15.9
  Bottom Layer w0.75: 25.717,16.293 25.717,16.459 30.556,21.298 C2_E5.2 35.293,21.171 U1_E5.14
NetJ12_1: J12.1 R2_E1.2 R8_E1.1 U1_E1.8 | length 28.3
  Bottom Layer w0.75: R2_E1.2 41.694,92.768 ; U1_E1.8 39.662,86.475 43.149,89.962 45.181,89.962 45.181,90.978 ; 45.288,88.602 45.288,90.87 45.181,90.978 ; J12.1 42.837,95.377 41.694,94.234 41.694,92.768 ; 41.694,92.768 43.39,92.768 45.181,90.978
NetJ12_2: J12.2 U1_E2.3 | length 37.8
  Top Layer w0.75: v1(53.962,79.121) 54.089,79.248 v1(62.979,79.248)
  Bottom Layer w0.75: J12.2 51.308,81.775 v1(53.962,79.121) ; v1(62.979,79.248) 71.488,79.248 72.25,78.486 U1_E2.3
NetJ23_1: J23.1 R2_E2.2 R8_E2.1 U1_E2.8 | length 39.9
  Bottom Layer w0.75: R2_E2.2 84.442,92.596 86.138,92.596 87.929,90.805 ; U1_E2.8 82.41,86.303 85.897,89.789 87.929,89.789 87.929,90.805 ; 88.036,88.429 88.036,88.9 ; J23.1 95.758,84.455 91.313,88.9 88.036,88.9 ; 87.929,90.805 88.036,90.697 88.036,88.9
NetJ23_2: J23.2 U1_E3.3 | length 41.9
  Top Layer w0.75: v1(80.15,53.594) 89.04,53.594 v1(89.167,53.721)
  Bottom Layer w0.75: U1_E3.3 70.879,54.356 71.641,53.594 v1(80.15,53.594) ; v1(89.167,53.721) 91.821,53.721 95.758,57.658 J23.2
NetJ34_1: J34.1 R2_E3.2 R8_E3.1 U1_E3.8 | length 28.3
  Bottom Layer w0.75: J34.1 57.798,35.814 58.687,36.703 58.687,40.246 ; 55.093,44.413 55.093,42.145 55.2,42.037 ; U1_E3.8 60.719,46.539 57.232,43.053 55.2,43.053 55.2,42.037 ; R2_E3.2 58.687,40.246 ; 55.2,42.037 56.991,40.246 58.687,40.246
NetJ34_2: J34.2 U1_E4.3 | length 62.7
  Top Layer w0.75: v1(19.418,46.228) 17.272,46.228 14.986,43.942 14.986,36.449 18.161,33.274 v1(43.942,33.274)
  Bottom Layer w0.75: v1(19.418,46.228) 27.927,46.228 28.689,45.466 U1_E4.3 ; v1(43.942,33.274) 46.228,33.274 48.768,35.814 J34.2
NetJ45_1: J45.1 R2_E4.2 R8_E4.1 U1_E4.8 | length 125.4
  Top Layer w0.75: v1(9.398,9.271) 5.588,9.271 2.159,12.7 2.159,34.671 2.794,35.306 2.794,49.657 5.842,52.705 10.795,52.705 13.462,55.372 20.701,55.372 22.225,53.848 29.718,53.848 31.75,55.88 31.75,62.103 35.052,65.405 37.338,65.405 38.608,64.135 v1(40.881,64.135) v1@40.754,64.262
  Bottom Layer w0.75: v1(9.398,9.271) J45.1 ; R2_E4.2 40.881,59.576 ; U1_E4.8 38.849,53.283 42.336,56.769 44.368,56.769 44.368,57.785 ; v1(40.881,64.135) 40.881,59.576 ; 44.475,55.409 44.475,57.677 44.368,57.785 ; 40.881,59.576 42.577,59.576 44.368,57.785
NetJ45_2: J45.2 U1_E5.3 | length 26.4
  Top Layer w0.75: v1(22.085,12.192) 22.212,12.319 v1(31.102,12.319)
  Bottom Layer w0.75: J45.2 19.164,9.271 v1(22.085,12.192) ; v1(31.102,12.319) 39.611,12.319 40.373,11.557 U1_E5.3
NetJGAIN_1: JGAIN.1 R2_E5.2 R8_E5.1 U1_E5.8 Vout.1 | length 82.3
  Top Layer w0.75: v1@52.438,30.353 v1(52.565,30.226)
  Bottom Layer w0.75: R2_E5.2 52.565,25.667 ; U1_E5.8 50.533,19.374 54.02,22.86 56.052,22.86 56.052,23.876 ; v1(52.565,30.226) 52.565,25.667 ; 56.159,21.5 56.159,23.768 ; JGAIN.1@63.754,19.177 60.751,19.177 59.944,19.984 ; Vout.1 93.853,10.033 89.662,5.842 66.04,5.842 59.944,11.938 59.944,19.984 ; 52.565,25.667 54.261,25.667 56.052,23.876 ; 56.052,23.876 56.159,23.768 ; 56.159,23.768 59.944,19.984
NetJGAIN_2: JGAIN.2 Rg1.1 | length 5
  Bottom Layer w0.75: JGAIN.2@63.754,16.637 63.754,14.383 65.666,12.471
NetR4_E1_1: R4_E1.1 R5_E1.1 R6_E1.1 U1_E1.1 U1_E1.2 | length 49.9
  Top Layer w0.75: v1(14.516,85.771) 14.77,85.517 v1(20.358,85.517)
  Bottom Layer w0.75: v1(14.516,85.771) 14.516,91.105 16.205,92.794 ; 18.092,92.794 16.205,92.794 ; v1(20.358,85.517) 18.326,83.485 18.326,77.227 20.831,74.722 ; 23.915,72.728 23.369,72.728 22.825,72.728 20.831,74.722 ; 24.893,96.477 19.939,96.477 19.914,96.502 16.205,92.794 ; U1_E1.2 U1_E1.1 22.098,76.842 20.831,75.576 20.831,74.722
NetR4_E2_1: R4_E2.1 R5_E2.1 R6_E2.1 U1_E2.1 U1_E2.2 | length 49.9
  Top Layer w0.75: v1(57.264,85.598) 57.518,85.344 v1(63.106,85.344)
  Bottom Layer w0.75: v1(57.264,85.598) 57.264,90.932 58.953,92.621 ; 60.84,92.621 58.953,92.621 ; v1(63.106,85.344) 61.074,83.312 61.074,77.054 63.58,74.549 ; 66.663,72.555 66.117,72.555 65.573,72.555 63.58,74.549 ; 67.641,96.304 62.687,96.304 62.662,96.329 58.953,92.621 ; U1_E2.2 U1_E2.1 64.846,76.67 63.58,75.403 63.58,74.549
NetR4_E3_1: R4_E3.1 R5_E3.1 R6_E3.1 U1_E3.1 U1_E3.2 | length 49.9
  Top Layer w0.75: v1(80.023,47.498) 85.611,47.498 v1(85.865,47.244)
  Bottom Layer w0.75: U1_E3.2 U1_E3.1 78.283,56.172 79.549,57.439 79.549,58.293 ; 75.488,36.538 80.442,36.538 80.467,36.512 84.176,40.221 ; 76.466,60.287 77.012,60.287 77.556,60.287 79.549,58.293 ; v1(80.023,47.498) 82.055,49.53 82.055,55.788 79.549,58.293 ; 82.289,40.221 84.176,40.221 ; v1(85.865,47.244) 85.865,41.91 84.176,40.221
NetR4_E4_1: R4_E4.1 R5_E4.1 R6_E4.1 U1_E4.1 U1_E4.2 | length 49.9
  Top Layer w0.75: v1(13.703,52.578) 13.957,52.324 v1(19.545,52.324)
  Bottom Layer w0.75: v1(13.703,52.578) 13.703,57.912 15.392,59.601 ; 17.279,59.601 15.392,59.601 ; v1(19.545,52.324) 17.513,50.292 17.513,44.034 20.019,41.529 ; 23.102,39.535 22.556,39.535 22.012,39.535 20.019,41.529 ; 24.08,63.284 19.126,63.284 19.101,63.309 15.392,59.601 ; U1_E4.2 U1_E4.1 21.285,43.65 20.019,42.383 20.019,41.529
NetR4_E5_1: R4_E5.1 R5_E5.1 R6_E5.1 U1_E5.1 U1_E5.2 | length 49.9
  Top Layer w0.75: v1(25.387,18.669) 25.641,18.415 v1(31.229,18.415)
  Bottom Layer w0.75: v1(25.387,18.669) 25.387,24.003 27.076,25.692 ; 28.963,25.692 27.076,25.692 ; v1(31.229,18.415) 29.197,16.383 29.197,10.125 31.703,7.62 ; 34.786,5.626 34.24,5.626 33.696,5.626 31.703,7.62 ; 35.764,29.375 30.81,29.375 30.785,29.4 27.076,25.692 ; U1_E5.2 U1_E5.1 32.969,9.741 31.703,8.474 31.703,7.62
NetR6_E1_2: R6_E1.2 R7_E1.1 R8_E1.2 U1_E1.9 | length 29.3
  Top Layer w0.75: v1(38.735,95.377) 38.735,94.851 40.043,93.543 v1(40.043,89.669)
  Bottom Layer w0.75: R6_E1.2 33.591,96.52 37.592,96.52 v1(38.735,95.377) ; v1(40.043,89.669) 38.646,88.272 38.646,85.986 U1_E1.9 37.122,83.034 38.196,81.961 41.098,81.961 44.654,78.405
NetR6_E2_2: R6_E2.2 R7_E2.1 R8_E2.2 U1_E2.9 | length 28.9
  Top Layer w0.75: v1(79.883,96.279) 82.791,93.37 v1(82.791,89.497)
  Bottom Layer w0.75: R6_E2.2 v1(79.883,96.279) ; v1(82.791,89.497) 81.394,88.1 81.394,85.814 U1_E2.9 79.87,82.861 80.944,81.788 83.846,81.788 87.402,78.232
NetR6_E3_2: R6_E3.2 R7_E3.1 R8_E3.2 U1_E3.9 | length 28.9
  Top Layer w0.75: v1(60.338,43.345) 60.338,39.472 v1(63.246,36.563)
  Bottom Layer w0.75: 55.727,54.61 59.283,51.054 62.185,51.054 63.259,49.981 U1_E3.9 61.735,47.028 61.735,44.742 v1(60.338,43.345) ; v1(63.246,36.563) R6_E3.2
NetR6_E4_2: R6_E4.2 R7_E4.1 R8_E4.2 U1_E4.9 | length 28.9
  Top Layer w0.75: v1(36.322,63.259) 39.23,60.35 v1(39.23,56.477)
  Bottom Layer w0.75: R6_E4.2 v1(36.322,63.259) ; v1(39.23,56.477) 37.833,55.08 37.833,52.794 U1_E4.9 36.309,49.841 37.383,48.768 40.285,48.768 43.841,45.212
NetR6_E5_2: R6_E5.2 R7_E5.1 R8_E5.2 U1_E5.9 | length 28.9
  Top Layer w0.75: v1(48.006,29.35) 50.914,26.441 v1(50.914,22.568)
  Bottom Layer w0.75: R6_E5.2 v1(48.006,29.35) ; v1(50.914,22.568) 49.517,21.171 49.517,18.885 U1_E5.9 47.993,15.932 49.067,14.859 51.969,14.859 55.525,11.303
NetRg1_2: Rg1.2 Rg2.1 U2.6 | length 9.5
  Bottom Layer w0.75: Rg1.2 74.32,12.471 75.482,12.471 ; 76.08,12.471 75.482,12.471 ; U2.6 79.673,16.497 78.657,15.481 77.26,15.481 75.482,13.703 75.482,12.471
NetRg2_2: "Vout Gain.1" Rg2.2 U2.7 | length 29.9
  Bottom Layer w0.75: U2.7 82.213,16.243 83.356,15.1 86.023,15.1 86.912,14.211 ; Rg2.2 86.036,12.446 86.912,13.322 86.912,14.211 ; 94.107,25.019 94.107,22.479 96.139,20.447 96.139,16.51 95.377,15.748 92.583,15.748 91.046,14.211 86.912,14.211
NetU1_E1_3: U1_E1.3 Vin1.1 | length 32
  Top Layer w0.75: v1(3.302,79.248) 20.059,79.248 v1(20.231,79.421)
  Bottom Layer w0.75: v1(3.302,79.248) Vin1.1 ; v1(20.231,79.421) 28.74,79.421 29.502,78.659 U1_E1.3
pads on no net: R1_E1. R1_E2. R1_E3. R1_E4. R1_E5. R2_E1. R2_E2. R2_E3. R2_E4. R2_E5. R3_E1. R3_E2. R3_E3. R3_E4. R3_E5. R4_E1. R4_E2. R4_E3. R4_E4. R4_E5. R5_E1. R5_E2. R5_E3. R5_E4. R5_E5. R6_E1. R6_E2. R6_E3. R6_E4. R6_E5. R7_E1. R7_E2. R7_E3. R7_E4. R7_E5. R8_E1. R8_E2. R8_E3. R8_E4. R8_E5. Rg1. Rg2. U2.1 U2.2 U2.3
copper on no net: | length 799.9
  Top Layer w0.25: 0,0 99.95,0 99.975,0.025 99.975,100 0,100 0,0
  Bottom Layer w0.25: 0,0 99.95,0 99.975,0.025 99.975,100 0,100 0,0

## Silkscreen, mask and mechanical layers (free items; w line width, h text height)
Top Overlay:
  text "Vout" at 44.615,93.772 h1.52 r90
  text "VCC-" at 11.976,89.327 h1.52 r90
  text "VCC+" at 14.008,80.31 h1.52 r90
  text "Vin" at 11.227,73.452 h1.52 r90